# EAGLE board lm358-thermostat (EAGLE 5.07)
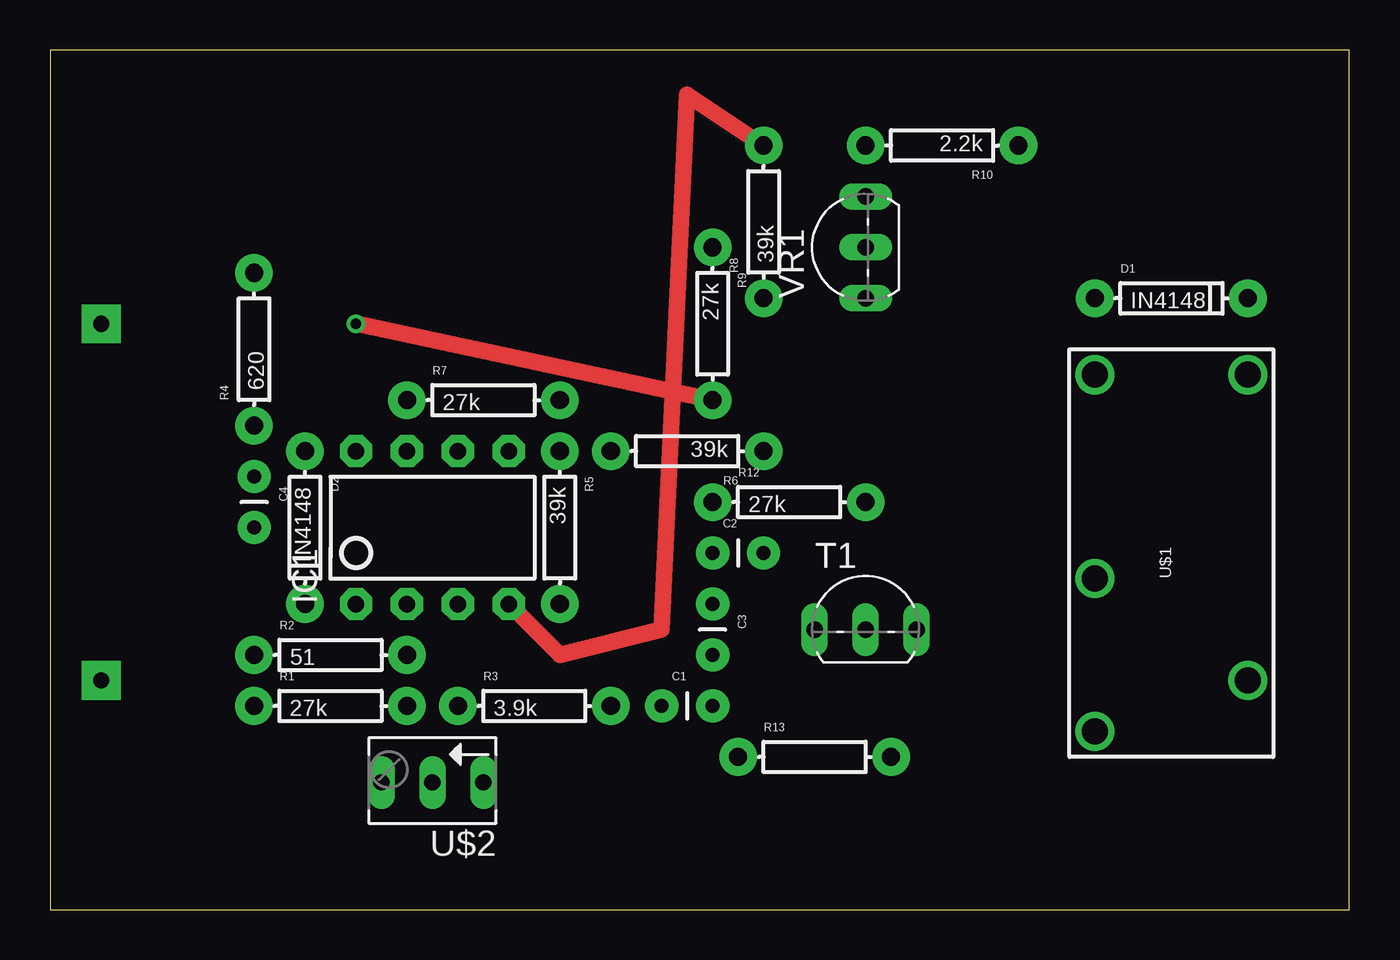
[diagram p0: board, top side]
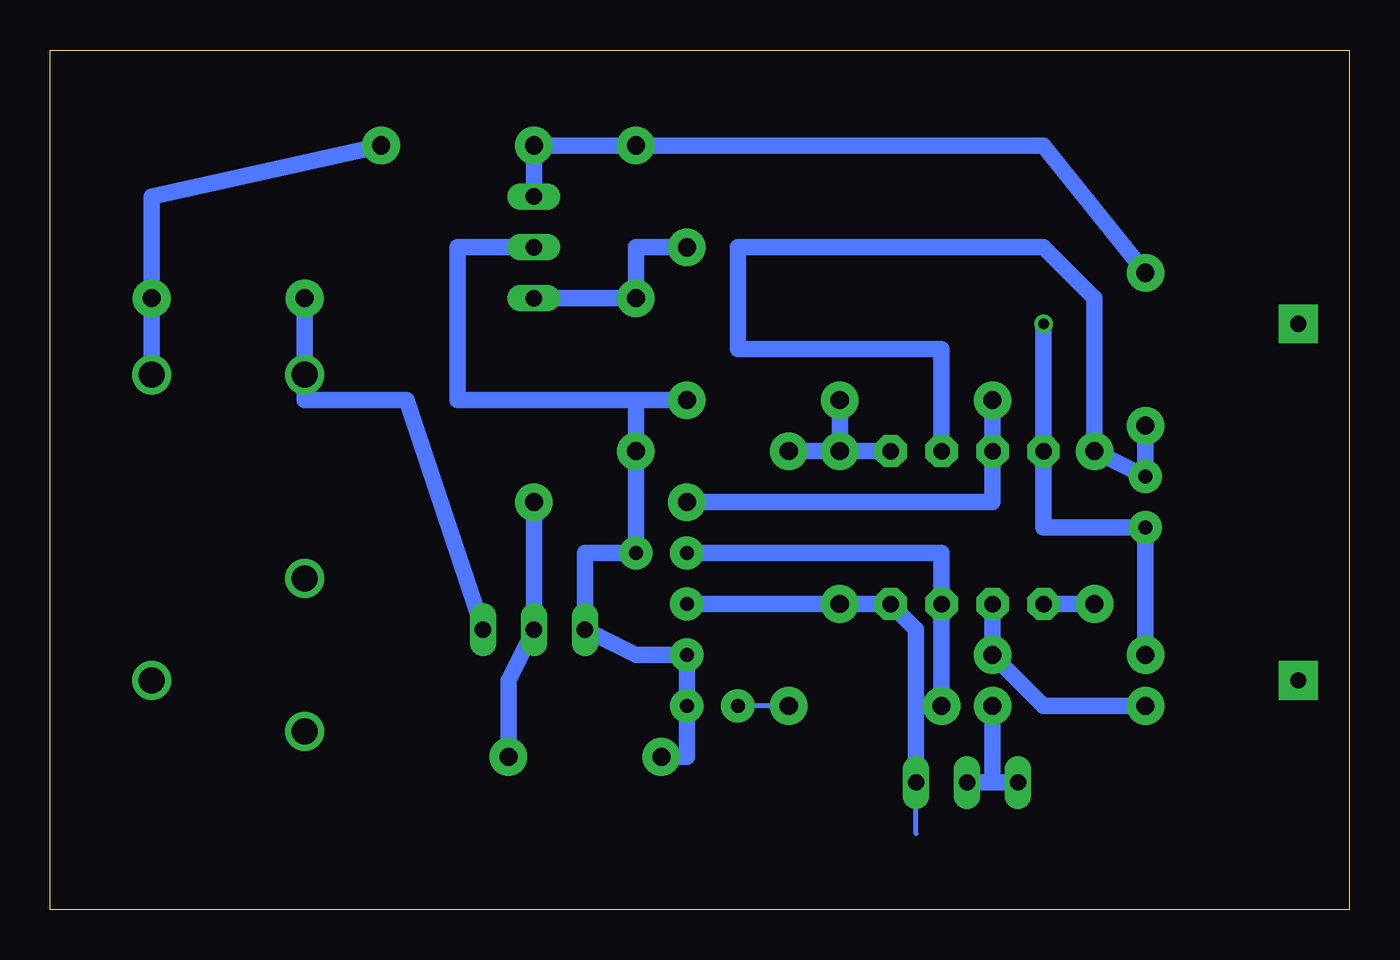
[diagram p1: board, bottom side, seen from below]

Size 64.75 x 42.85 mm. Coordinates in mm from the lower left corner, seen from the top.
Outline: 0,0 64.75,0 64.75,42.85 0,42.85 0,0
Copper layers (1*16): Top 0.035mm / dielectric 1.5mm / Bottom 0.035mm
Design rules "default": minimum track width 10mil, minimum drill 24mil, track to track 8mil, track to pad 8mil, pad to pad 8mil, via to via 8mil, smd to smd 8mil, copper to edge 40mil, drill to drill 8mil, minimum pad ring 10mil, minimum via ring 8mil, stop-mask expansion 4mil, vias tented up to drill 0mil, thermal gap 10mil

## Footprints (pad centres in the part's own frame; a part is rotated, then mirrored left to right if it is on the bottom)
CAP-PTH-SMALL = drill 0.7 pad 1.651 round: 1 0,0; 2 2.54,0
DIODE-1N4148 = drill 0.9 pad 1.88 round: A -3.81,0; C 3.81,0
DIP08 = drill 0.813 pad 1.6 octagon: 1 -3.81,-3.81; 2 -1.27,-3.81; 3 1.27,-3.81; 4 3.81,-3.81; 5 3.81,3.81; 6 1.27,3.81; 7 -1.27,3.81; 8 -3.81,3.81
AXIAL-0.3 = drill 0.9 pad 1.88 round: P$1 -3.81,0; P$2 3.81,0
TO92-EBC = drill 0.813 long: B 0,-1.27; C 2.54,-1.27; E -2.54,-1.27
RELAY-G5Q = drill 1.3 round: 1 8.89,3.81; 2 -1.27,3.81; 3 -8.89,3.81; 4 -6.35,-3.81; 5 8.89,-3.81
B64Y = drill 0.813 long: A 2.54,0; E -2.54,0; S 0,0
TO92-RAC = drill 0.813 long: A 0,0; C 2.54,0; R -2.54,0
PAD-SQ2 = drill 0.813 pad 1.93 square: 1 0,0

## Placement (x,y rotation side)
C1  104  [CAP-PTH-SMALL]  30.48,10.16 0 top
C2  222  [CAP-PTH-SMALL]  33.02,17.78 0 top
C3  474  [CAP-PTH-SMALL]  33.02,15.24 270 top
C4  224  [CAP-PTH-SMALL]  10.16,21.59 270 top
D1  IN4148  [DIODE-1N4148]  55.88,30.48 0 top
D2  IN4148  [DIODE-1N4148]  12.7,19.05 270 top
IC1  LM358  [DIP08]  19.05,19.05 0 top
R1  27k  [AXIAL-0.3]  13.97,10.16 0 top
R2  51  [AXIAL-0.3]  13.97,12.7 0 top
R3  3.9k  [AXIAL-0.3]  24.13,10.16 0 top
R4  620  [AXIAL-0.3]  10.16,27.94 90 top
R5  39k  [AXIAL-0.3]  25.4,19.05 270 top
R6  39k  [AXIAL-0.3]  31.75,22.86 180 top
R7  27k  [AXIAL-0.3]  21.59,25.4 0 top
R8  39k  [AXIAL-0.3]  35.56,34.29 90 top
R9  27k  [AXIAL-0.3]  33.02,29.21 270 top
R10  2.2k  [AXIAL-0.3]  44.45,38.1 180 top
R12  27k  [AXIAL-0.3]  36.83,20.32 0 top
R13  [AXIAL-0.3]  38.1,7.62 0 top
T1  [TO92-EBC]  40.64,15.24 0 top
U$1  RELAYPTH  [RELAY-G5Q]  55.88,17.78 90 top
U$2  50k  [B64Y]  19.05,6.35 180 top
VR1  [TO92-RAC]  40.64,33.02 90 top
X1  [PAD-SQ2]  2.54,11.43 0 top
X2  [PAD-SQ2]  2.54,29.21 0 top

## Library data of the parts
C1-C4 D1 D2 IC1 R1-R10 R12 R13 T1 U$2 VR1 = digital-toy
U$1 = SparkFun
X1 X2 = yhf_spec-RF

## Nets
GND: C1.2 C2.2 C3.2 C4.2 IC1.8 R2.P$1 R6.P$1 R9.P$2 R13.P$1 T1.E VR1.A
N$1: C2.1 IC1.3 R3.P$1
N$2: IC1.2 R1.P$1 R2.P$2
N$3: R1.P$2 U$2.A U$2.S
N$4: IC1.7 R7.P$1 R12.P$1
N$5: C1.1 R3.P$2
N$6: D2.C IC1.1
N$7: C4.1 D2.A IC1.6 R4.P$1
N$8: R12.P$2 R13.P$2 T1.B
N$9: D1.A T1.C U$1.1
N$10: C3.1 IC1.4 R4.P$2 R5.P$2 R8.P$2 R10.P$2 U$2.E VR1.C
N$11: IC1.5 R5.P$1 R6.P$2 R7.P$2
N$12: R8.P$1 R9.P$1 VR1.R
N$13: D1.C R10.P$1 U$1.5

## Tracks (layer width: path | path; a pad name or v marks a point on that pad's centre or on a via)
GND  (via drill 0.51)
  Top 0.813: v15.24,29.21 R9.P$2
  Bottom 0.813: v15.24,29.21 IC1.8 15.24,19.05 C4.2 R2.P$1 | R13.P$1 33.02,7.62 C1.2 C3.2 35.56,12.7 T1.E 38.1,17.78 C2.2 R6.P$1 35.56,25.4 | R9.P$2 35.56,25.4 | VR1.A 44.45,33.02 44.45,25.4 35.56,25.4
N$1
  Bottom 0.813: C2.1 20.32,17.78 IC1.3 R3.P$1
N$2
  Bottom 0.813: IC1.2 R2.P$2 15.24,10.16 R1.P$1
N$3
  Bottom 0.813: 17.78,6.35 U$2.S | U$2.A 17.78,6.35 | 17.78,6.35 R1.P$2
N$4
  Bottom 0.813: R7.P$1 IC1.7 17.78,20.32 R12.P$1
N$5
  Bottom 0.254: R3.P$2 C1.1
N$6
  Bottom 0.813: D2.C IC1.1
N$7
  Bottom 0.813: IC1.6 20.32,27.94 30.48,27.94 30.48,33.02 15.24,33.02 12.7,30.48 D2.A C4.1 R4.P$1
N$8
  Bottom 0.813: R12.P$2 T1.B 41.91,11.43 R13.P$2
N$9
  Bottom 0.813: T1.C 46.99,25.4 52.07,25.4 U$1.1 D1.A
N$10
  Top 0.813: IC1.4 25.4,12.7 30.48,13.97 31.75,40.64 R8.P$2
  Bottom 0.254: 21.59,3.81 U$2.E
  Bottom 0.813: U$2.E 21.59,13.97 IC1.4 R5.P$2 C3.1 | VR1.C R10.P$2 R8.P$2 15.24,38.1 R4.P$2
N$11
  Bottom 0.813: IC1.5 R5.P$1 | R5.P$1 R7.P$2 | R5.P$1 R6.P$2
N$12
  Bottom 0.813: VR1.R R8.P$1 35.56,33.02 R9.P$1
N$13
  Bottom 0.813: R10.P$1 59.69,35.56 D1.C U$1.5